# Allegro board QUADCOPTER1brd3_2.brd
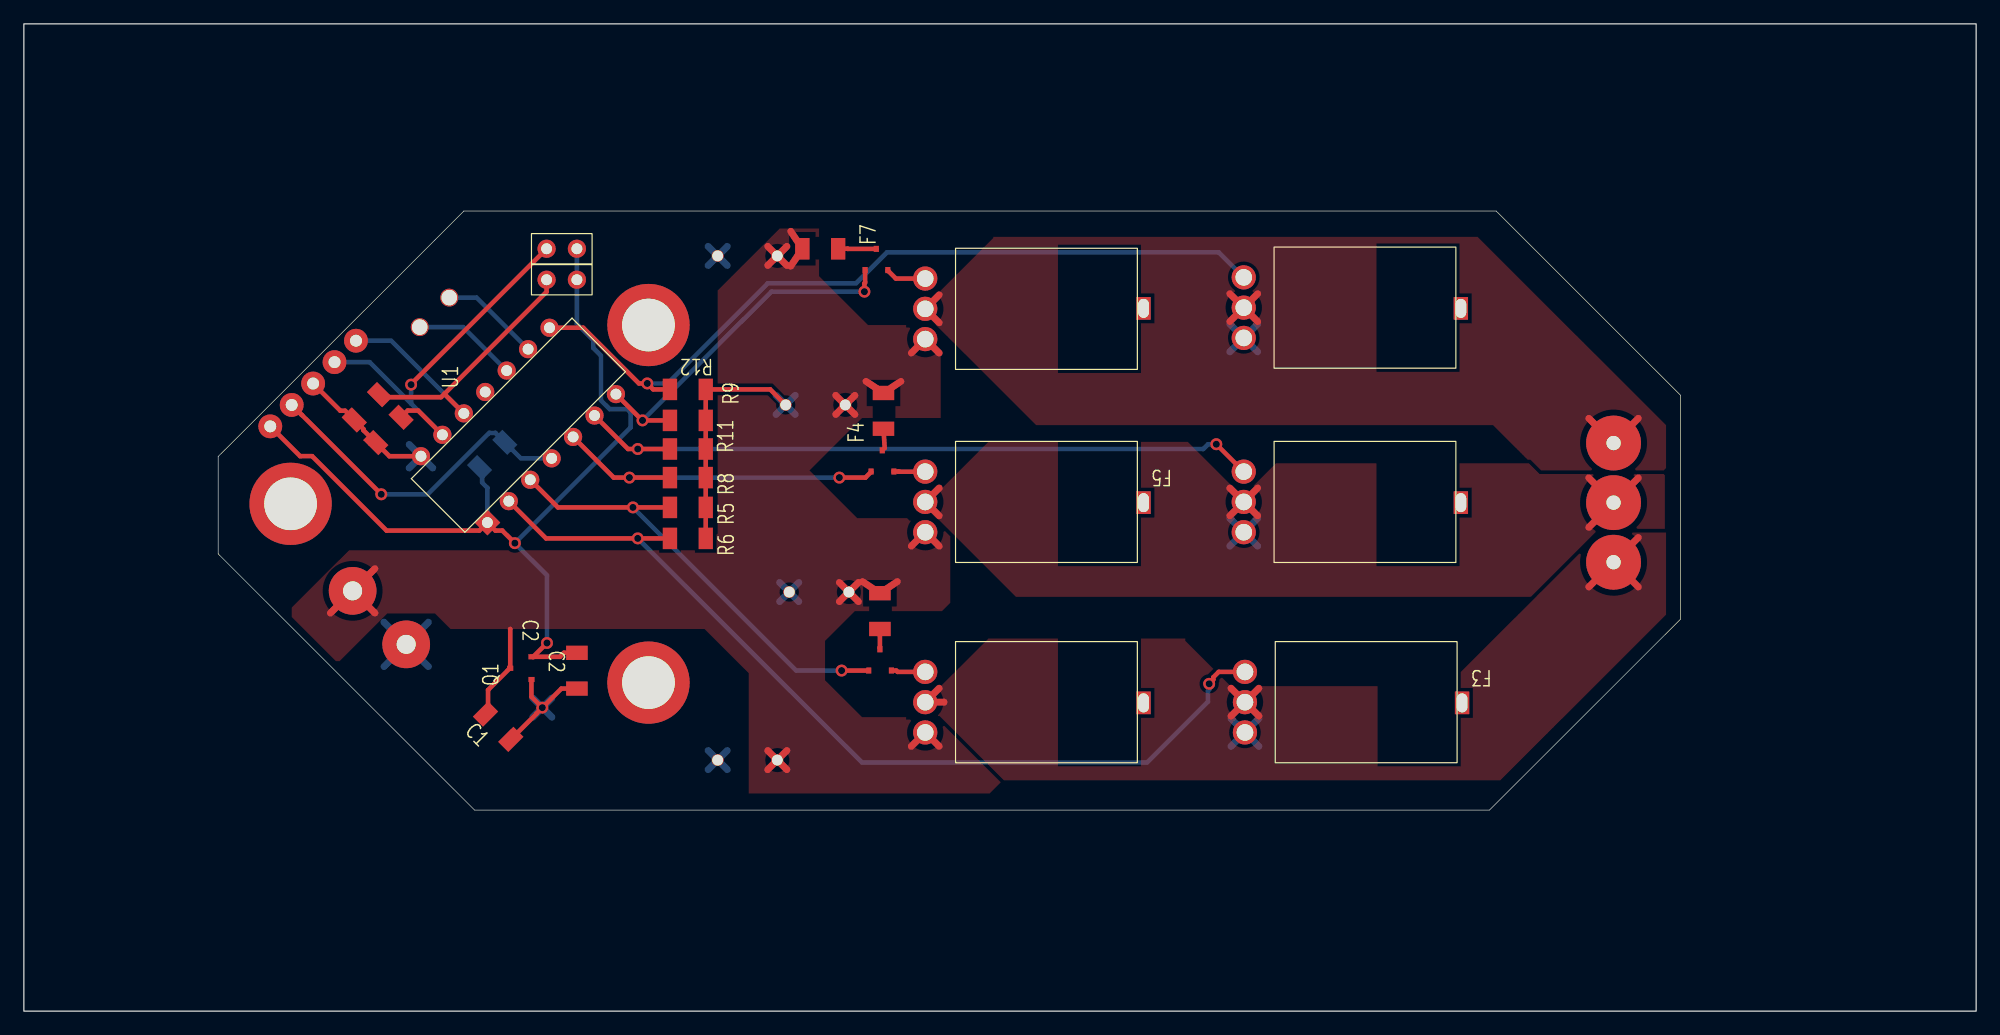
[diagram p0: board, top side]
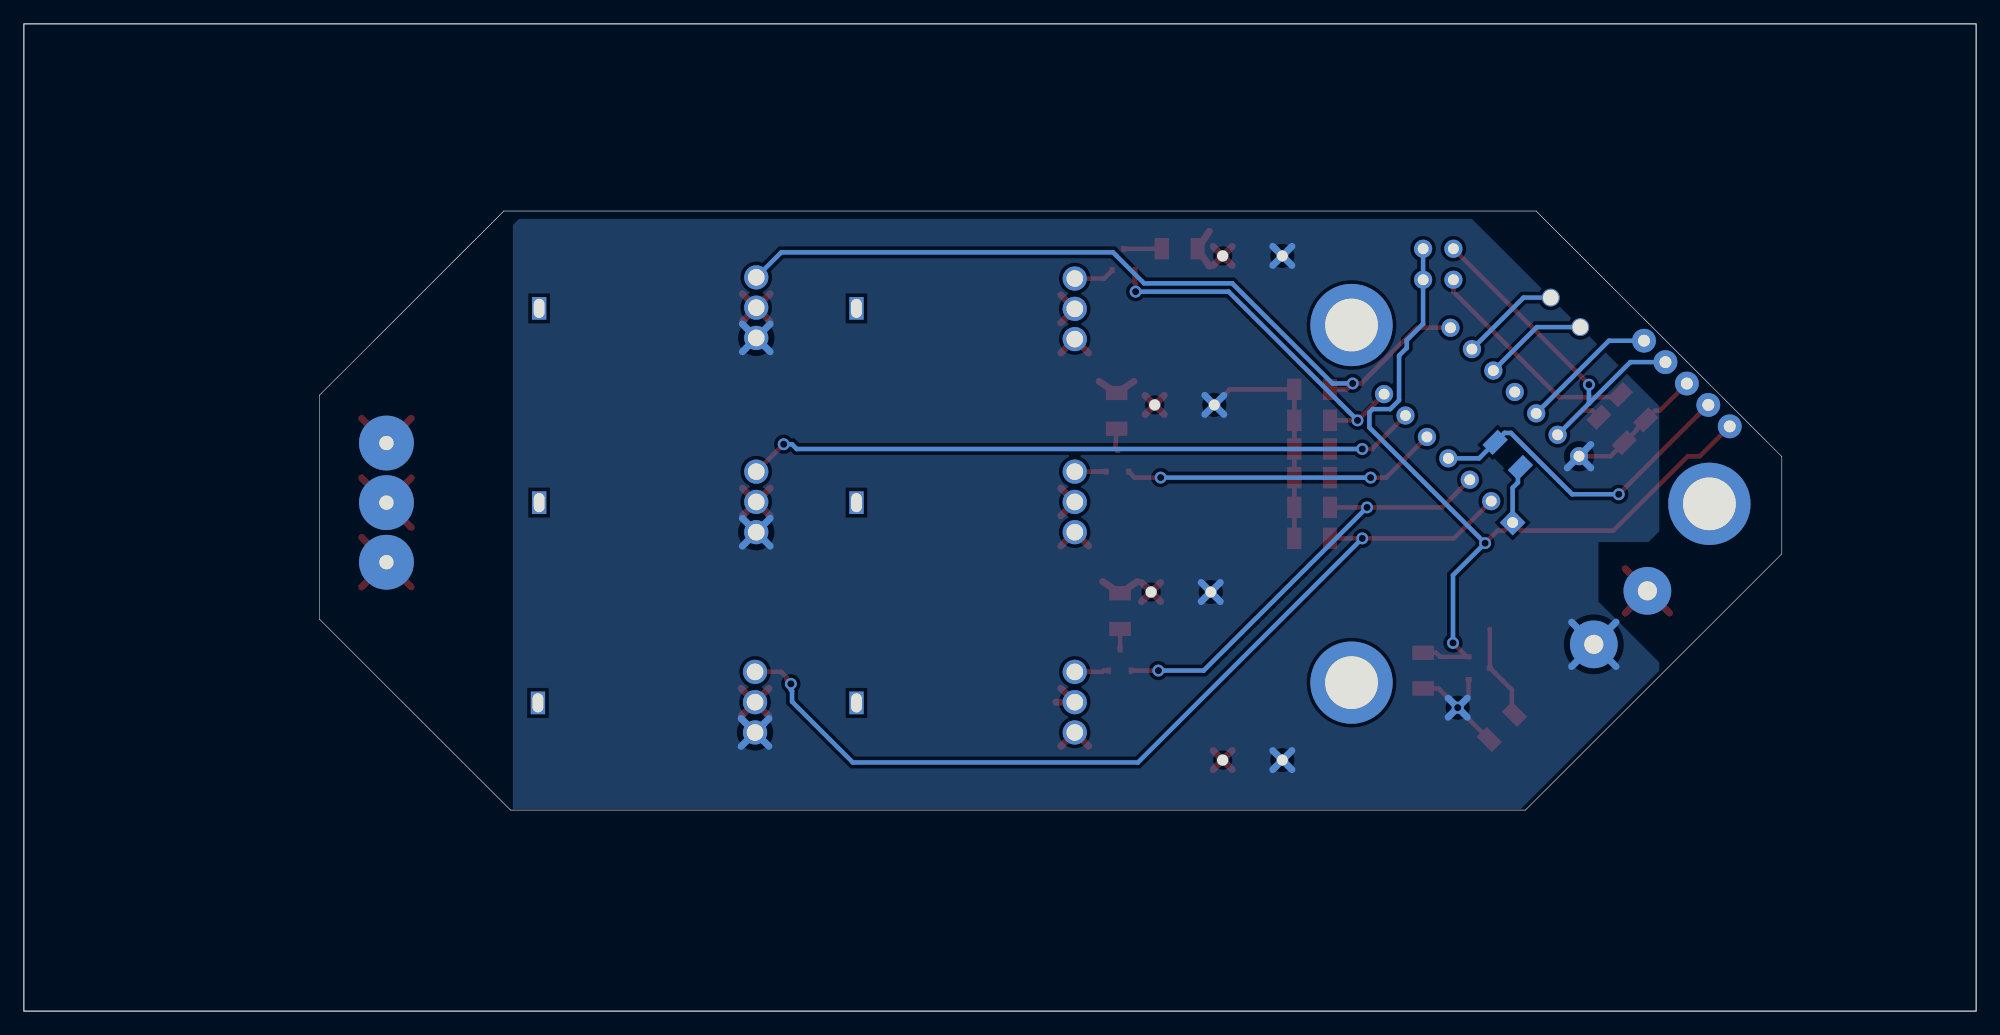
[diagram p1: board, bottom side, seen from below]

Outline 163.65 x 82.83 mm; copper layers: TOP, BOTTOM. Coordinates in mm from the lower left corner of the outline.
Outline path: rectangle 0,0 163.65,82.83 ; 16.29,46.53 16.29,38.36 37.78,16.87 122.86,16.87 138.86,32.88 138.86,51.68 123.42,67.13 36.89,67.13 16.29,46.53

## Placement (name value [footprint] x y rotation side)
C1  1uF  [SMD_CAP_1206]  39.76 23.86 315 top
C2  1uF  [SMD_CAP_1206]  46.36 28.56 270 top
C3  100uF  [CAP250]  66.16 24.06 180 top
C4  100uF  [CAP250]  72.16 38.16 180 top
C5  100uF  [CAP250]  66.16 66.36 180 top
C6  100uF  [CAP250]  71.86 53.86 180 top
F1  2N7002  [SOT23]  71.76 29.46 90 top
F2  IRF9Z34N  [TO220-3]  75.56 28.46 180 top
F3  IRFZ34N  [TO220-3]  102.36 28.46 180 top
F4  2N7002  [SOT23]  71.96 46.16 90 top
F5  IRF9Z34N  [TO220-3]  75.56 45.26 180 top
F6  IRFZ34N  [TO220-3]  102.26 45.26 180 top
F7  2N7002  [SOT23]  71.46 63.06 90 top
F8  IRF9Z34N  [TO220-3]  75.56 61.46 180 top
F9  IRFZ34N  [TO220-3]  102.26 61.56 180 top
J1  CON2  [KDCONN2]  27.56 35.26 315 top
J2  CON2  [KDCONN2_2]  35.66 59.86 225 top
J4  CON5  [CONN5]  18.86 49.06 315 top
J5  JUMPER  [JUMPER2]  46.36 63.96 180 top
J6  JUMPER  [JUMPER2]  46.36 61.36 180 top
J7  CON3  [ED1362]  135.76 35.16 90 top
NOREF  -  [unnamed]  124.56 19.46 180 top
NOREF#2  -  [unnamed]  97.86 36.26 180 top
NOREF#3  -  [unnamed]  124.46 52.56 180 top
NOREF#4  -  [unnamed#2]  52.36 27.56 0 top
NOREF#5  -  [unnamed]  97.86 52.56 180 top
NOREF#6  -  [unnamed]  97.86 19.46 180 top
NOREF#7  -  [unnamed]  124.46 36.26 180 top
NOREF#8  -  [unnamed#2]  52.36 57.56 0 top
NOREF#9  -  [unnamed#2]  22.36 42.56 0 top
Q1  Diodes_AP1117T50L-U  [SOT23]  41.66 28.76 180 top
R1  10k  [SMD_RES_1206]  39.26 46.66 225 bottom
R2  10k  [SMD_RES_1206]  28.76 50.66 45 top
R3  10k  [SMD_RES_1206]  30.56 48.76 45 top
R4  10k  [SMD_RES_1206]  71.76 33.56 90 top
R5  10k  [SMD_RES_1206]  55.66 42.26 180 top
R6  10k  [SMD_RES_1206]  55.66 39.66 180 top
R7  10k  [SMD_RES_1206]  72.06 50.36 90 top
R8  10k  [SMD_RES_1206]  55.66 44.76 180 top
R9  10k  [SMD_RES_1206]  55.66 47.16 180 top
R10  10k  [SMD_RES_1206]  66.76 63.96 180 top
R11  10k  [SMD_RES_1206]  55.66 49.56 180 top
R12  10k  [SMD_RES_1206]  55.66 52.16 180 top
U1  PIC16F1503  [PIC16FL1503]  41.46 49.16 135 top

## Library data of the parts
C1-C6 = CAP
F1 F4 F7 = 2N7002_1
F2 F5 F8 = IRF9Z34N_2
F3 F6 F9 = IRFZ34N
J1 J2 = CON2
J4 = CON5
J5 J6 = JUMPER: User Part Number: ***
J7 = CON3
Q1 = Diodes_AP1117T50L-U_1
R1-R12 = R
U1 = PIC16LF1503_4

## Footprints (pads in the part's own frame, mm; a bottom-side part is the same pattern mirrored in y, then rotated)
CAP250
  round 1 hole 0.9: 1(3,3) 2(8,3)
CONN5
  round 2 hole 1: 1(1.27,11.43) 2(1.27,8.89) 3(1.27,6.35) 4(1.27,3.81) 5(1.27,1.27)
ED1362
  round 4.6 hole 1.2: 1(2.5,2.5) 2(7.5,2.5) 3(12.5,2.5)
JUMPER2
  round 1.524 hole 0.914: 1(0,0) 2(2.54,0)
KDCONN2
  round 4 hole 1.6: 1(0,0) 2(6.35,0)
KDCONN2_2
  round 1.5 hole 1.3: 1(0,0) 2(3.5,0)
PIC16FL1503
  rect 1.524x1.524 hole 0.914: 1(-3.937,7.62)
  round 1.524 hole 0.914: 2(-3.937,5.08) 3(-3.937,2.54) 4(-3.937,0) 5(-3.937,-2.54) 6(-3.937,-5.08) 7(-3.937,-7.62) 8(3.937,-7.62) 9(3.937,-5.08) 10(3.937,-2.54) 11(3.937,0) 12(3.937,2.54) 13(3.937,5.08) 14(3.937,7.62)
SMD_CAP_1206
  rect 1.2x1.8 smd: 1(-1.5,0) 2(1.5,0)
SMD_RES_1206
  rect 1.2x1.8 smd: 1(-1.5,0) 2(1.5,0)
SOT23
  rect 0.508x0.432 smd: 1(-0.889,0.94) 2(-0.889,-0.965) 3(0.889,0)
TO220-3
  round 2.032 hole 1.397: 1(0,0) 2(0,2.54) 3(0,5.08)
unnamed
  rect 1.2x1.9 hole 0.9x1.6: (4,-6.4)
unnamed#2
  round 6.9 hole 4.42: (0,0)

## Nets
12V: C1.1 C3.1 C4.1 C5.1 C6.1 F2.3(S) F5.3(S) F8.3(S) J1.1 Q1.3(VIN) R4.2 R7.2 R10.2
0: C1.2 C2.2 C3.2 C4.2 C5.2 C6.2 F3.3(S) F6.3(S) F9.3(S) J1.2 J4.3 Q1.1(GND) R2.1 R3.1 R5.1 R6.1 R8.1 R9.1 R11.1 R12.1 U1.14(VSS)
A: F2.2(D) F3.2(D) J7.1
ADDR0: J4.2 J5.2 R3.2 U1.13(ICSPDAT/ADDR0)
ADDR1: J4.1 J6.2 R2.2 U1.12(ICSPCLK/ADDR1)
AHIGH: F1.1(GATE) R5.2 U1.3(RA4)
ALOW: F3.1(G) R6.2 U1.2(RA5)
B: F5.2(D) F6.2(D) J7.2
BHIGH: F4.1(GATE) R8.2 U1.5(RC5)
BLOW: F6.1(G) R9.2 U1.6(RC4)
C: F8.2(D) F9.2(D) J7.3
CHIGH: F7.1(GATE) R11.2 U1.7(RC3)
CLOW: F9.1(G) R12.2 U1.8(RC2)
NMCLR: J4.4 R1.1 U1.4(NMCLR)
SCL: J2.2 U1.10(SCL)
SDA: J2.1 U1.9(SDA)
VEXT: C2.1 J4.5 J5.1 J6.1 Q1.2(VOUT) R1.2 U1.1(VDD)
N175255: F4.2(SOURCE) F5.1(G)
N175303: F4.3(DRAIN) R7.1
N175727: F7.2(SOURCE) F8.1(G)
N175775: F7.3(DRAIN) R10.1
N177443: F1.2(SOURCE) F2.1(G)
N1635110: F1.3(DRAIN) R4.1

Pads without a net: U1 11

## Via types
v1: diameter 1, hole 0.6, TOP to BOTTOM, 16 vias

## Routing (per net, layer and track width the routed paths; a pad name or vN(x,y) marks a point on that pad's centre or on a via; arc(x,y) is an arc through that point)
12V: length 54.4
  TOP w0.381: C1.1 38.91,25.14 38.91,26.94 40.73,28.76 Q1.3 40.77,32.05 40.76,32.06
  TOP w0.581: 62.36,21.86 C3.1 ; C3.1 63.96,20.26 ; C3.1 63.96,21.86 ; C3.1 62.36,20.26 ; 74.4,39.02 F5.3 76.72,39.02 ; 70.6,52.84 R7.2 73.52,52.84 ; 64.29,65.42 R10.2 64.29,62.51 ; 62.36,62.56 C5.1 ; C5.1 63.96,62.56 ; C5.1 63.96,64.16 ; C5.1 62.36,64.16 ; 25.7,33.4 J1.1 ; J1.1 29.42,33.4 ; J1.1 29.42,37.12 ; 74.4,55.22 F8.3 76.72,55.22 ; 68.06,50.06 C6.1 ; C6.1 69.66,50.06 ; C6.1 69.66,51.66 ; C6.1 68.06,51.66 ; C4.1 69.96,34.36 ; C4.1 68.36,34.36 ; C4.1 69.96,35.96 ; C4.1 68.36,35.96 ; 73.22,36.04 R4.2 70.3,36.04 ; 76.72,22.22 F2.3 74.4,22.22
0: length 98.5
  TOP w0.381: Q1.1 42.55,26.38 v1(43.46,25.46) ; U1.14 30.64,46.56 R3.1 28.47,48.73 28.47,48.83 R2.1 26.93,50.37 26.53,50.37 J4.3 ; C6.2 62.56,52.16 R12.1 R11.1 R9.1 R8.1 R5.1 R6.1 ; v1(43.46,25.46) 45.06,27.06 C2.2 ; v1(43.46,25.46) 42.97,24.98 42.97,24.95 C1.2
  BOTTOM w0.581: 32.3,47.54 U1.14 ; U1.14 34.27,45.57 ; U1.14 32.3,45.57 ; C4.2 64.96,35.96 ; C4.2 63.36,34.36 ; C4.2 63.36,35.96 ; C4.2 64.96,34.36 ; 57.36,20.26 C3.2 ; C3.2 58.96,21.86 ; C3.2 57.36,21.86 ; C3.2 58.96,20.26 ; 30.19,32.63 J1.2 ; J1.2 33.91,32.63 ; J1.2 30.19,28.91 ; J1.2 33.91,28.91 ; 101.1,55.32 F9.3 ; F9.3 103.42,57.65 ; F9.3 101.1,57.65 ; F9.3 103.42,55.32 ; 101.2,24.55 F3.3 ; F3.3 101.2,22.22 ; F3.3 103.52,24.55 ; F3.3 103.52,22.22 ; 42.66,26.26 v1(43.46,25.46) ; v1(43.46,25.46) 44.26,26.26 ; v1(43.46,25.46) 44.26,24.66 ; v1(43.46,25.46) 42.66,24.66 ; C5.2 58.96,62.56 ; C5.2 57.36,64.16 ; C5.2 57.36,62.56 ; C5.2 58.96,64.16 ; 101.1,41.35 F6.3 ; F6.3 103.42,41.35 ; F6.3 103.42,39.02 ; F6.3 101.1,39.02 ; 63.06,51.66 C6.2 ; C6.2 64.66,51.66 ; C6.2 63.06,50.06 ; C6.2 64.66,50.06
A: length 18.6
  TOP w0.581: J7.1 135.33,35.59 ; J7.1 131.19,35.59 ; J7.1 135.33,39.74 ; F3.2 103.52,27.09 ; F3.2 101.2,24.76 ; F3.2 101.2,27.09 ; F3.2 103.52,24.76 ; 77.14,25.92 F2.2 76.72,27.09
ADDR0: length 33.8
  TOP w0.381: R3.2 32.18,50.38 33.06,50.38 U1.13 ; J5.2 32.46,52.6 v1(32.46,52.56)
  BOTTOM w0.381: J4.2 28.99,54.45 32.46,50.98 ; 32.46,50.98 U1.13 ; 32.46,50.98 v1(32.46,52.56)
ADDR1: length 32.6
  TOP w0.381: J6.2 43.82,60.36 35.25,51.78 ; R2.2 30.03,51.51 34.98,51.51 35.25,51.78 ; 35.25,51.78 U1.12
  BOTTOM w0.381: U1.12 30.78,56.25 J4.1
AHIGH: length 38.1
  TOP w0.381: R5.2 v1(51.06,42.26) 44.77,42.26 U1.3 ; F1.1 v1(68.55,28.58)
  BOTTOM w0.381: v1(68.55,28.58) 64.75,28.58 v1(51.06,42.26)
ALOW: length 77.6
  TOP w0.381: R6.2 v1(51.46,39.66) 43.78,39.66 U1.2 ; v1(99.36,27.46) 99.71,27.81 99.71,28.01 100.16,28.46 F3.1
  BOTTOM w0.381: v1(51.46,39.66) 70.26,20.86 94.16,20.86 99.26,25.96 99.26,26.87 99.36,26.97 v1(99.36,27.46)
B: length 18.7
  TOP w0.581: F6.2 103.42,41.56 ; F6.2 103.42,43.89 ; F6.2 101.1,43.89 ; F6.2 101.1,41.56 ; 76.72,43.89 F5.2 76.72,41.56 ; 131.19,40.59 J7.2 ; J7.2 135.33,44.74 ; J7.2 131.19,44.74
BHIGH: length 30
  TOP w0.381: F4.1 71.02,45.24 70.55,44.76 v1(68.36,44.76) ; R8.2 v1(50.76,44.76) 49.45,44.76 U1.5
  BOTTOM w0.381: v1(50.76,44.76) v1(68.36,44.76)
BLOW: length 59.4
  TOP w0.381: U1.6 50.64,47.16 v1(51.46,47.16) R9.2 ; F6.1 v1(99.96,47.56)
  BOTTOM w0.381: v1(99.96,47.56) 99.27,47.56 98.87,47.16 v1(51.46,47.16)
C: length 15.7
  TOP w0.581: 101.1,60.19 F9.2 ; F9.2 103.42,57.86 ; F9.2 103.42,60.19 ; F9.2 101.1,57.86 ; 131.19,49.74 J7.3 135.33,49.74 ; 76.72,60.09 F8.2 76.72,57.76
CHIGH: length 30.4
  TOP w0.381: U1.7 51.84,49.56 v1(51.86,49.56) R11.2 ; F7.1 70.52,61.11 70.46,61.05 v1(70.46,60.36)
  BOTTOM w0.381: v1(70.46,60.36) 62.66,60.36 v1(51.86,49.56)
CLOW: length 67.7
  TOP w0.381: U1.8 46.89,57.34 51.56,52.66 v1(52.26,52.66) 52.76,52.16 R12.2
  BOTTOM w0.381: v1(52.26,52.66) 53.96,52.66 62.36,61.06 69.75,61.06 72.35,63.66 100.16,63.66 F9.1
NMCLR: length 27.9
  TOP w0.381: v1(29.96,43.36) 23.31,50.02 23.29,50.02 J4.4
  BOTTOM w0.381: U1.4 41.67,46.38 R1.1 39.53,48.51 39.01,48.51 33.86,43.36 v1(29.96,43.36)
SCL: length 8.8
  BOTTOM w0.381: U1.10 36.83,57.39 J2.2
SDA: length 8.4
  BOTTOM w0.381: J2.1 37.94,59.86 U1.9
VEXT: length 76.5
  TOP w0.381: J4.5 23.16,46.56 24.16,46.56 30.41,40.32 38.18,40.32 U1.1 39.53,40.32 40.11,40.32 v1(41.16,39.26) ; 42.69,29.73 44.93,29.73 45.27,30.06 C2.1 ; 42.69,29.73 Q1.2 ; 42.69,29.73 v1(43.85,30.89)
  BOTTOM w0.381: J5.1 J6.1 46.36,57.66 47.73,56.3 47.73,55.65 48.37,55 48.37,51.25 49.11,50.51 50.58,50.51 50.86,50.23 50.86,48.97 v1(41.16,39.26) 43.85,36.57 v1(43.85,30.89) ; U1.1 38.86,43.91 38.41,44.35 38.41,45.39 R1.2
N175255: length 2.6
  TOP w0.381: F5.1 73.34,45.26 73.33,45.27 F4.2
N175303: length 1.9
  TOP w0.381: R7.1 72.16,47.25 F4.3
N175727: length 3.5
  TOP w0.381: F8.1 73.1,61.46 72.43,62.14 F7.2
N175775: length 3.2
  TOP w0.381: R10.1 69.05,63.96 69.06,63.95 71.46,63.95
N177443: length 2.9
  TOP w0.381: F1.2 73.13,28.58 73.24,28.46 F2.1
N1635110: length 1.7
  TOP w0.381: F1.3 R4.1

## Copper pours and planes (outline as drawn; the poured copper is in the pictures)
12V on TOP: 76.56,24.66 70.26,24.66 67.16,27.76 67.16,31.06 69.66,33.56 76.96,33.56 77.66,34.26 77.66,40.16 76.46,41.36 69.86,41.36 65.86,45.36 70.26,49.76 76.86,49.76 76.86,57.06 76.36,57.56 70.76,57.56 66.66,61.66 66.66,65.66 63.36,65.66 58.16,60.46 58.16,40.06 56.76,38.66 27.26,38.66 22.46,33.86 22.46,33.06 26.16,29.36 26.46,29.36 30.46,33.36 34.46,33.36 35.76,32.06 57.06,32.06 60.76,28.36 60.76,18.26 80.96,18.26 81.96,19.26
0 on BOTTOM: 122.66,16.96 122.66,65.96 122.16,66.46 42.26,66.46 26.56,50.76 26.56,40.26 27.46,39.36 31.66,39.36 31.66,34.36 26.56,29.26 26.56,28.56 38.16,16.96
A on TOP: 74.26,24.76 76.76,24.76 82.16,19.36 123.76,19.36 137.66,33.26 137.66,40.16 132.16,40.16 119.26,27.26 101.16,27.26 97.36,31.06 97.36,31.26 80.86,31.26 76.76,27.16 74.46,27.16 74.26,26.96
B on TOP: 137.56,40.26 132.16,40.26 126.66,34.76 83.16,34.76 76.46,41.46 74.36,41.46 74.26,41.56 74.26,43.86 74.36,43.96 77.06,43.96 80.86,47.76 97.56,47.76 101.36,43.96 102.96,43.96 104.96,45.96 126.16,45.96 127.06,45.06 137.46,45.06 137.56,44.96
C on TOP: 137.36,45.26 127.06,45.26 123.16,49.16 84.86,49.16 76.36,57.66 74.26,57.66 74.26,60.16 76.56,60.16 81.26,64.86 81.26,64.96 121.86,64.96 137.66,49.16 137.66,45.56
